# Altium PCB NucleoClone.PcbDoc (part 3 of 3)
Units mm, origin at the board's own origin, x right, y up, seen from the top; angles counter-clockwise.
Board outline 100 x 100 mm, 4 copper layers (Top Layer, Signal Layer 2, Signal Layer 1, Bottom Layer), stack 0.778 mm thick; 118 components, 177 nets, 571 pads, 394 vias.
Unrouted connection lines stored in the file: 5.
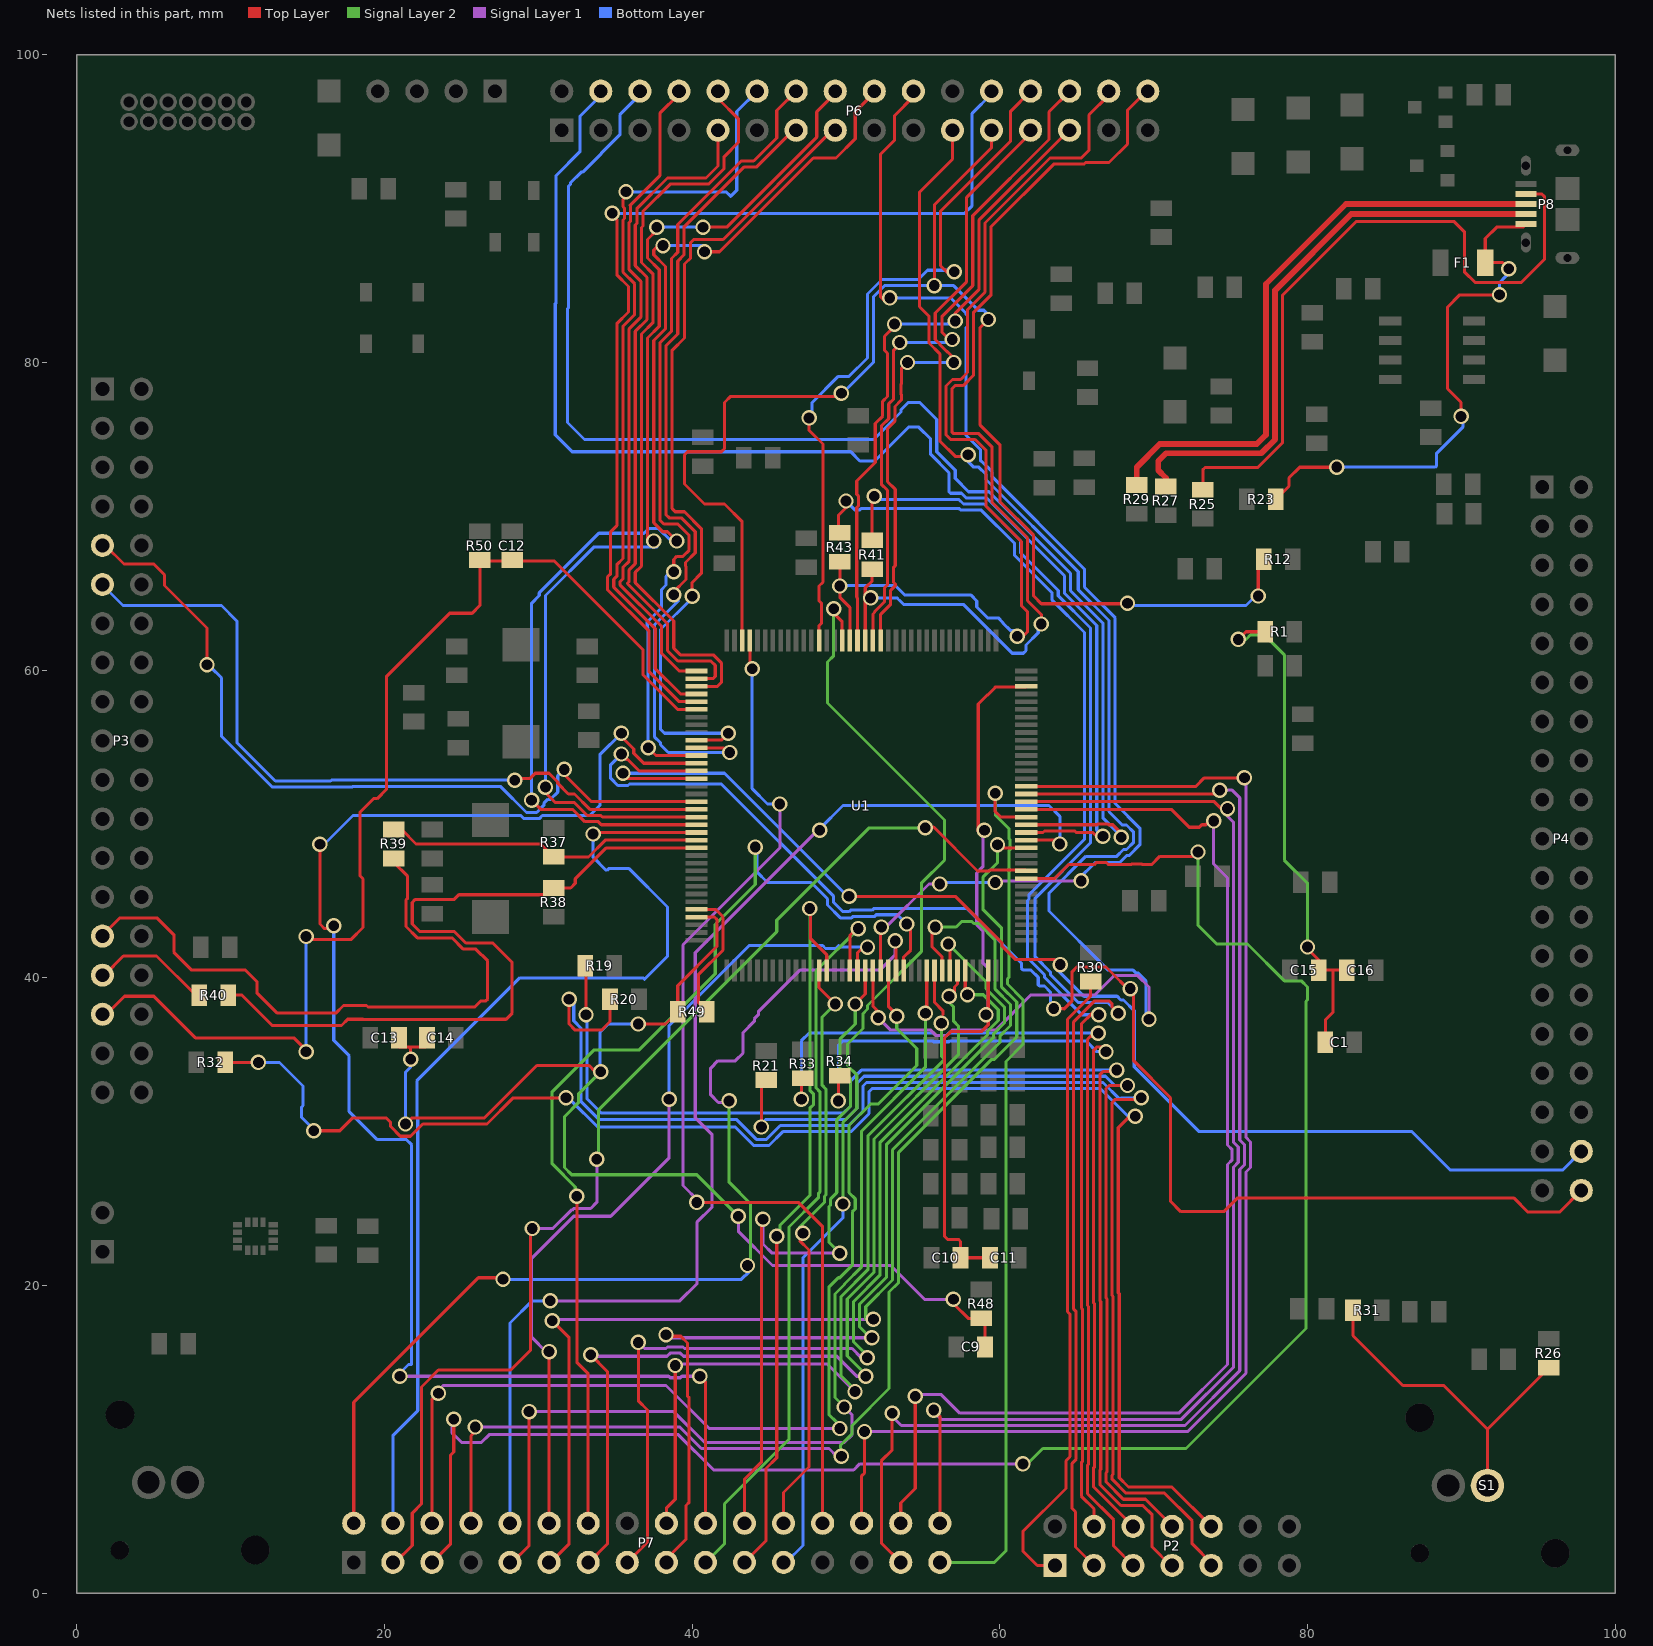
[diagram p5: the nets of this part, all layers, seen from the top]

## Via types
v1: diameter 1, hole 0.7, Top Layer to Bottom Layer, tented both sides, 390 vias
v2: diameter 1.27, hole 0.711, Top Layer to Bottom Layer, 4 vias

## Nets (pads, with @x,y where several pads share a name; then routed paths per layer and width w, separated by ;. In a path a pad name is that pad's centre, name@x,y a point inside that pad or via, vN(x,y) a via of type N, cw(c..) or ccw(c..) an arc to the next point about the centre after c; other vN are vias at no path point) (continued)
PD12: P7.5 U1.PD12 | length 119.3
  Top Layer w0.2: P7.5@23.08,2 23.1,2 24.3,3.2 24.3,8.975 24.5,9.175 24.5,11.1 v1@24.3,11.3 ; U1.PD12@61.725,46.45 63.55,46.45 64.46,47.36 66.129,47.36 66.269,47.5 66.931,47.5 67.071,47.36 68.529,47.36 68.569,47.4 69.231,47.4 69.271,47.36 69.86,47.36 70.4,47.9 72.7,47.9 v1@72.8,48
  Signal Layer 1 w0.2: v1@24.4,11.3 24.4,10.4 25,9.8 26.3,9.8 26.8,10.3 39.1,10.3 41.4,8 50.5,8 50.9,8.4 v1(61.5,8.4)
  Signal Layer 2 w0.2: v1(61.5,8.4) 61.8,8.4 62.8,9.4 72.1,9.4 79.9,17.2 79.9,38.469 80,38.569 80,39.4 79.6,39.8 78.5,39.8 76.1,42.2 74.1,42.2 72.88,43.42 v1(72.88,48.18)
  other v1: 24.5,11.3
PD13: P7.3 U1.PD13 | length 75.8
  Top Layer w0.2: P7.3@20.54,2 20.7,2 21.8,3.1 21.8,5.2 22.4,5.8 22.4,13.4 23.5,14.5 28.2,14.5 29.5,15.8 v1@29.5,23.6 ; v1@55.25,49.8 55.7,49.8 58.55,46.95 59.319,46.95 59.369,47 61.675,47 U1.PD13@61.725,46.95
  Signal Layer 1 w0.2: v1(29.6,23.7) 30.934,23.7 32.134,24.9 32.2,24.9 32.3,25 33.4,25 33.8,25.4 v1(33.8,28.2)
  Signal Layer 2 w0.2: v1@33.9,28.4 33.9,31.4 45.5,43 45.5,43.741 51.509,49.75 v1(55.15,49.75)
PD14: P7.8 U1.PD14 | length 78.5
  Top Layer w0.2: P7.8@25.62,4.54 25.62,10.22 v1@26.15,10.75 ; v1@60,48.6 60.15,48.45 U1.PD14@61.725,48.45
  Signal Layer 1 w0.2: v1@26,10.8 39.2,10.8 40.6,9.4 48.9,9.4 49.4,8.9 v1(49.7,8.9)
  Signal Layer 2 w0.2: v1@49.631,9.031 49.631,9.6 50.4,10.369 50.4,10.9 52.8,13.3 52.8,19.572 53.42,20.192 53.42,28.654 59.466,34.7 59.65,34.7 61.1,36.15 61.1,38.428 60.1,39.428 60.1,40.097 ; v1(59.85,48.65) 59.85,47.481 58.9,46.531 58.9,44.46 60.1,43.26 60.1,40.097
  other v1: 25.9,10.8
PD15: P7.10 U1.PD15 | length 80.3
  Top Layer w0.2: U1.PD15@61.725,48.95 v1@63.75,48.95
  Signal Layer 1 w0.2: v1@30.8,19 39.2,19 40.3,20.1 40.3,24.1 41.3,25.1 41.3,29.8 40.2,30.9 40.2,41.634 48.166,49.6 v1(48.3,49.6)
  Bottom Layer w0.2: P7.10@28.16,4.54 28.16,17.56 29.6,19 v1(30.78,19) ; v1@48.3,49.7 49.8,51.2 63.2,51.2 63.9,50.5 v1(63.9,48.7)
PE0: P7.26 U1.PE0 | length 68.7
  Top Layer w0.2: v1(40.3,25.4) 46.9,25.4 48.48,23.82 P7.26@48.48,4.54 ; v1@43.75,60.1 U1.PE0@43.75,61.925 U1.PE0@43.8,61.875
  Signal Layer 1 w0.2: v1@40.4,25.5 39.4,26.5 39.4,42.14 45.7,48.44 v1(45.7,51.3)
  Bottom Layer w0.2: v1(43.9,60.1) 43.9,52.3 44.9,51.3 v1@45.6,51.3
PE1: P6.23 R12.2 U1.PE1 | length 92.3
  Top Layer w0.2: U1.PE1@43.25,61.925 43.25,69.65 42.1,70.8 40.8,70.8 39.5,72.1 39.5,74 39.7,74.2 41.9,74.2 42.1,74.4 42.1,77.4 42.5,77.8 v1@49.5,77.8 ; v1(55.74,85) 55.74,90.24 59.46,93.96 P6.23@59.46,95.1 ; v1(59.25,82.8) 58.7,82.25 58.7,75.96 60,74.66 60,70.966 62.2,68.766 62.2,64.92 62.2,64.82 62.7,64.32 v1@68.4,64.32 ; v1(76.8,64.82) 76.8,66.84 R12.2@77.16,67.2
  Bottom Layer w0.2: v1(49.7,78) 49.769,78 51.8,80.031 51.8,84.291 52.509,85 v1@55.4,85 ; v1(55.74,85) 57,85 58.6,83.4 58.96,83.4 v1@59.36,83 ; v1(68.3,64.35) 68.45,64.2 76,64.2 v1@76.71,64.91
PE2: P6.8 U1.PE2 | length 42.7
  Top Layer w0.2: P6.8@39.14,97.64 39.14,97.44 37.9,96.2 37.9,92.15 35.973,90.223 36,90.197 36,89.203 35.9,89.103 35.9,86.04 36.66,85.28 36.66,82.952 35.9,82.191 35.9,69.063 35.9,67.737 35.9,67.092 35.5,66.691 35.5,65.937 35.3,65.737 35.3,65.56 38,62.86 38,61.1 39.15,59.95 U1.PE2@40.275,59.95
PE3: P6.9 U1.PE3 | length 44.9
  Top Layer w0.2: U1.PE3@40.275,59.45 41.35,59.45 41.5,59.6 41.5,60.31 41.21,60.6 39.066,60.6 38.4,61.266 38.4,63.026 35.8,65.626 35.8,65.672 35.9,65.771 35.9,66.526 36.3,66.926 36.3,67.903 36.3,68.897 36.3,82.026 37.06,82.786 37.06,85.54 36.3,86.3 36.3,88.937 36.4,89.037 36.4,90 38.4,92 40.9,92 41.68,92.78 P6.9@41.68,95.1
PE4: P6.10 U1.PE4 | length 49.2
  Top Layer w0.2: U1.PE4@40.275,58.95 41.65,58.95 41.9,59.2 41.9,60.476 41.376,61 39.231,61 38.8,61.431 38.8,63.192 36.3,65.692 36.3,66.36 36.7,66.76 36.7,68.068 36.7,68.731 36.7,81.86 37.46,82.62 37.46,85.74 36.7,86.5 36.7,88.771 36.8,88.871 36.8,89.834 38.566,91.6 41.066,91.6 42.08,92.614 42.08,93.38 43,94.3 43,95.85 41.68,97.17 P6.10@41.68,97.64
PE5: P6.12 U1.PE5 | length 50.4
  Top Layer w0.2: 35.5,69.228 35.5,67.571 35.5,67.257 35.1,66.857 35.1,66.103 34.9,65.903 34.9,65.395 37.6,62.695 37.6,60.1 39.25,58.45 U1.PE5@40.275,58.45 ; 35.5,69.228 35.5,82.357 36.26,83.117 36.26,85.114 35.5,85.874 35.5,89.269 35.6,89.368 35.6,90.031 35.5,90.131 35.5,90.6
  Bottom Layer w0.2: v1(35.7,91.1) 42.2,91.1 42.5,90.8 42.9,91.2 42.9,96.32 P6.12@44.22,97.64
PE6: P6.24 U1.PE6 | length 67.3
  Top Layer w0.2: v1@34.8,89.6 35.1,89.3 35.1,85.708 35.86,84.948 35.86,83.283 35.1,82.523 35.1,69.394 34.7,68.994 34.7,66.269 34.5,66.069 34.5,65.229 37.2,62.529 37.2,59.9 39.15,57.95 U1.PE6@40.275,57.95
  Bottom Layer w0.2: v1(34.8,89.7) 57.7,89.7 58.2,90.2 58.2,96.2 59.46,97.46 P6.24@59.46,97.64
PE7: P7.6 U1.PE7 | length 69.4
  Top Layer w0.2: P7.6@23.08,4.54 23.08,12.58 v1(23.5,13) ; U1.PE7@52.75,40.475 52.75,38.15 v1@53.34,37.56
  Signal Layer 1 w0.2: v1@23.5,13.2 23.8,13.5 38.3,13.5 41.1,10.7 v1(49.6,10.7)
  Signal Layer 2 w0.2: v1@49.4,11.1 48.883,11.617 48.883,19.883 49.5,20.5 49.6,20.5 50.416,21.316 50.416,24.784 50.6,24.969 50.6,25.631 50.2,26.031 50.2,30.4 51.6,31.8 52.1,31.8 54.6,34.3 54.6,35.4 53.3,36.7 v1(53.3,37.5)
PE8: P7.2 U1.PE8 | length 70.3
  Top Layer w0.2: P7.2@18,4.54 18,12.4 26.1,20.5 v1@27.8,20.5 ; U1.PE8@53.25,40.475 v1@53.25,42.3
  Signal Layer 1 w0.2: v1@42.2,31.9 41.7,31.9 41.2,32.4 41.2,34.131 41.669,34.6 42.8,34.6 43.3,35.1 43.3,36.434 44.04,37.174 44.04,37.331 44.3,37.591 44.3,37.8 47,40.5 52.2,40.5 53.2,41.5 v1(53.2,42.4)
  Signal Layer 2 w0.2: v1(42.4,32) 42.4,26.7 43.8,25.3 v1@43.8,21.6
  Bottom Layer w0.2: v1(27.7,20.4) 43.2,20.4 43.7,20.9 v1@43.7,21.3
  other v1: 43.6,21.3
PE9: P7.14 U1.PE9 | length 68.3
  Top Layer w0.2: v1@32.5,25.7 32.5,15 33.24,14.26 P7.14@33.24,4.54 ; U1.PE9@53.75,40.475 53.75,41.35 54.2,41.8 54.2,43.11 v1@53.9,43.41
  Signal Layer 2 w0.2: v1@32.4,25.8 32.4,26.403 30.9,27.903 30.9,32.6 33.6,35.3 36.534,35.3 41.5,40.266 41.5,43.466 44.1,46.066 v1(44.1,48.5)
  Bottom Layer w0.2: v1@44.2,48.4 44.2,46.9 44.9,46.2 47.734,46.2 48.8,45.134 48.8,44.734 49.634,43.9 50.369,43.9 50.469,44 51.869,44 51.969,44.1 53.35,44.1 v1(53.95,43.5)
  other v1: 32.5,25.8
PE10: P7.9 U1.PE10 | length 65
  Top Layer w0.2: P7.9@28.16,2 28.3,2 29.4,3.1 v1(29.4,11.8) ; v1@55.25,38.05 U1.PE10@55.25,40.475
  Signal Layer 1 w0.2: v1(29.4,11.8) 38.8,11.8 40.8,9.8 49.9,9.8 50.4,10.3 50.4,11.582 v1(49.882,12.1)
  Signal Layer 2 w0.2: v1@49.8,12.2 49.283,12.717 49.283,19.449 49.9,20.066 49.9,20.1 51.02,21.22 51.02,30.04 55.16,34.18 v1(55.16,37.7)
PE11: P7.18 U1.PE11 | length 53.1
  Top Layer w0.2: P7.18@38.32,4.54 38.32,5.52 38.9,6.1 v1(38.9,14.8) ; U1.PE11@55.75,40.475 55.75,38.41 56.3,37.86 56.3,37.63
  Signal Layer 1 w0.2: v1@38.8,14.9 48.782,14.9 v1(50.582,13.1)
  Signal Layer 2 w0.2: v1@50.5,13.3 49.683,14.117 49.683,19.283 51.42,21.02 51.42,29.72 56.41,34.71 56.2,34.921 v1(56.2,37.043)
PE12: P7.11 U1.PE12 | length 74.1
  Top Layer w0.2: P7.11@30.7,2 30.8,2 32,3.2 32,16.6 v1(30.9,17.7) ; v1@55.6,43.1 55.6,42 56.25,41.35 U1.PE12@56.25,40.475
  Signal Layer 1 w0.2: v1@30.9,17.8 v1(51.782,17.8)
  Signal Layer 2 w0.2: v1@51.383,17.817 51.283,17.817 51.283,18.62 53.02,20.357 53.02,28.82 60,35.8 60,36.197 60.7,36.897 60.7,38.263 59.7,39.263 59.7,40.263 59.7,42.45 58.62,43.53 58.311,43.53 58.181,43.66 57.519,43.66 57.159,43.3 v1(55.8,43.3)
PE13: P7.17 U1.PE13 | length 62.5
  Top Layer w0.2: v1@38.3,16.7 39.26,16.7 39.7,16.26 39.7,12.8 39.8,12.7 39.8,5.9 39.6,5.7 39.6,3.5 38.32,2.22 P7.17@38.32,2 ; v1@56.7,42.06 56.75,42.01 U1.PE13@56.75,40.475
  Signal Layer 1 w0.2: v1@38.5,16.6 v1(51.682,16.6)
  Signal Layer 2 w0.2: v1@51.5,16.7 50.883,17.317 50.883,18.786 52.62,20.523 52.62,29.154 59.6,36.134 59.6,36.363 60.3,37.063 60.3,38.097 59.1,39.297 59.1,39.74 v1(56.64,42.2)
  other v1: 38.3,16.8
PE14: P7.13 U1.PE14 | length 63.1
  Top Layer w0.2: P7.13@33.24,2 33.3,2 34.5,3.2 34.5,14.4 v1(33.4,15.5) ; v1@56.9,38.86 57.05,39.01 57.05,39.4 57.25,39.6 U1.PE14@57.25,40.475
  Signal Layer 1 w0.2: v1@33.4,15.4 38.369,15.4 38.569,15.6 39.231,15.6 39.431,15.4 49.4,15.4 50.7,14.1 v1(51.282,14.1)
  Signal Layer 2 w0.2: v1@51.2,14.3 50.083,15.417 50.083,19.117 51.82,20.854 51.82,29.52 57.3,35 57.3,36.868 57,37.169 57,38.1 56.7,38.4 v1(56.7,38.8)
PE15: P7.15 U1.PE15 | length 60.9
  Top Layer w0.2: P7.15@35.78,2 35.8,2 37.1,3.3 37.1,11.9 36.5,12.5 v1(36.5,16.3) ; U1.PE15@57.75,40.475 57.75,39.15 v1@57.9,39
  Signal Layer 1 w0.2: v1(36.5,16.3) 36.9,15.9 38.303,15.9 38.403,16 39.397,16 39.497,15.9 50.4,15.9 51,15.3 v1(51.382,15.3)
  Signal Layer 2 w0.2: v1@51.2,15.62 50.483,16.337 50.483,18.951 52.22,20.689 52.22,29.32 59.2,36.3 59.2,36.529 59.9,37.229 59.9,37.931 58.931,38.9 v1(57.9,38.9)
PF0: P6.15 U1.PF0 | length 53.2
  Top Layer w0.2: v1(40,64.8) 40,65.7 40.6,66.3 40.6,68.9 40.6,69.2 39.5,70.3 38.9,70.3 38.7,70.5 38.7,80.8 39.5,81.6 39.5,86.4 39.9,86.8 39.9,87.8 40.1,88 40.369,88 42.016,88 49.116,95.1 P6.15@49.3,95.1 ; U1.PF0@40.275,55.45 41.9,55.45 v1@42.25,55.8
  Bottom Layer w0.2: v1@39.9,64.6 37.94,62.64 37.94,56.16 38.2,55.9 v1(42.34,55.9)
PF1: P6.13 U1.PF1 | length 53.4
  Top Layer w0.2: v1(38.8,64.9) 38.8,65.1 39.6,65.9 39.6,66.731 39.566,66.765 39.566,67 40.2,67.634 40.2,69 39.3,69.9 38.5,69.9 38.3,70.1 38.3,81.1 39.06,81.86 39.06,86.595 39.46,86.995 39.46,88.805 43.356,92.7 44.166,92.7 46.76,95.294 P6.13@46.76,95.1 ; U1.PF1@40.275,54.95 42.05,54.95 v1@42.3,54.7
  Bottom Layer w0.2: 39.1,64.5 37.54,62.94 37.54,55.681 37.94,55.281 37.94,55.16 38.45,54.65 v1(42.44,54.65)
PF2: P6.14 U1.PF2 | length 52.8
  Top Layer w0.2: v1@37.3,54.8 37.65,54.45 U1.PF2@40.275,54.45 ; v1(38.8,66.4) 38.8,67.2 39,67.4 39.4,67.4 39.8,67.8 39.8,68.76 39.06,69.5 38.16,69.5 37.9,69.76 37.9,81.266 38.66,82.026 38.66,86.76 39.06,87.16 39.06,88.97 43.19,93.1 44,93.1 45.5,94.6 45.5,96.38 P6.14@46.76,97.64
  Bottom Layer w0.2: v1(37.14,54.95) 37.14,62.687 37.078,62.749 37.078,63.131 37.14,63.193 38,64.053 38,65.232 38.3,65.532 38.3,66.097 38.602,66.4 v1(38.8,66.4)
PF3: P7.20 U1.PF3 | length 98.3
  Top Layer w0.2: v1(15.8,48.69) 15.8,43.5 16.1,43.2 v1@16.3,43.2 ; v1@35.5,55.8 35.5,55.581 36.2,54.881 36.2,54.6 36.85,53.95 U1.PF3@40.275,53.95 ; v1(40.5,14.1) 40.86,13.74 P7.20@40.86,4.54
  Signal Layer 1 w0.2: v1(21,14.1) 38.469,14.1 38.569,14 39.231,14 39.331,14.1 v1@40.3,14.1
  Bottom Layer w0.2: v1@15.9,48.5 17.95,50.55 28.863,50.55 29.063,50.35 30.057,50.35 30.257,50.55 33.35,50.55 34,51.2 34,54.5 v1(35.4,55.9) ; v1(16.7,43.39) 16.7,35.931 17.7,34.931 17.7,31.3 19.5,29.5 21.4,29.5 21.76,29.14 21.76,14.86 21.56,14.86 v1@20.9,14.2
PF4: P4.38 U1.PF4 | length 94.2
  Top Layer w0.2: v1@35.6,54.3 35.7,54.2 35.8,54.2 36.55,53.45 U1.PF4@40.275,53.45 ; v1(63.5,38) 64.12,38 64.16,37.96 64.7,38.5 64.7,40.4 65,40.7 66.9,40.7 68.7,38.9 68.7,34.6 71.1,32.2 71.1,25.468 71.768,24.8 74.566,24.8 75.466,25.7 93.4,25.7 94.32,24.78 96.4,24.78 P4.38@97.8,26.18
  Bottom Layer w0.2: v1(35.4,54.55) 34.7,53.85 34.7,52.969 35.169,52.5 35.831,52.5 35.931,52.6 41.9,52.6 49.2,45.3 49.2,44.9 49.8,44.3 50.203,44.3 50.303,44.4 51.703,44.4 51.803,44.5 57.869,44.5 61.4,40.969 61.4,40.631 61.531,40.5 62.031,40.5 62.5,40.031 62.5,39.531 62.569,39.463 62.906,39.463 63.3,39.069 v1@63.3,38
  other v1: 68.48,39.3
PF5: P4.36 U1.PF5 | length 81.1
  Top Layer w0.2: v1@35.45,52.95 U1.PF5@40.275,52.95 ; v1(50.2,45.3) 57.107,45.3 60.15,42.257 60.15,42.05 61,41.2 63.594,41.2 v1(63.934,40.86)
  Bottom Layer w0.2: v1(35.5,53.3) 42.1,53.3 v1@50.175,45.225 ; v1(63.934,40.86) 63.667,40.593 65.46,38.8 67.629,38.8 67.869,38.56 68.04,38.56 68.74,37.86 68.74,34.22 72.96,30 86.8,30 89.3,27.5 96.58,27.5 P4.36@97.8,28.72
PF6: P3.9 U1.PF6 | length 52.3
  Top Layer w0.2: P3.9@1.66,68.11 1.85,68.11 3.06,66.9 5,66.9 5.7,66.2 5.7,65.5 8.46,62.74 v1(8.46,60.35) ; v1@31.7,53.4 31.7,53.2 33.45,51.45 U1.PF6@40.275,51.45
  Bottom Layer w0.2: v1@8.7,60.2 9.4,59.5 9.4,55.7 12.7,52.4 17.9,52.4 17.95,52.45 27.529,52.45 29.229,50.75 29.892,50.75 30.36,51.219 30.36,51.34 30.62,51.6 30.792,51.6 31.26,52.069 31.26,53.13 v1(31.68,53.55)
PF7: P3.11 U1.PF7 | length 49.5
  Top Layer w0.2: v1@28.7,52.95 29.45,52.95 29.8,53.3 30.692,53.3 31.26,52.731 31.26,52.64 31.95,51.95 32.35,51.95 33.35,50.95 U1.PF7@40.275,50.95
  Bottom Layer w0.2: P3.11@1.66,65.57 1.66,65.54 3,64.2 9.4,64.2 10.4,63.2 10.4,55.3 12.9,52.8 16.5,52.8 16.55,52.85 v1(28.46,52.85)
PF8: P6.16 U1.PF8 | length 70.2
  Top Layer w0.2: v1@30.5,52.4 30.5,52 31.1,51.4 32.334,51.4 33.184,50.55 34.057,50.55 34.157,50.45 U1.PF8@40.275,50.45 ; v1(37.5,68.4) 37.5,68.1 37.1,68.5 37.1,81.597 37.86,82.357 37.86,86.04 37.1,86.8 37.1,88 v1@37.7,88.6 ; v1(40.7,88.8) 42.25,88.8 48.1,94.65 48.1,96.3 49.3,97.5 P6.16@49.3,97.64
  Bottom Layer w0.2: v1(30.46,52.4) 30.46,64.86 33.6,68 37.7,68 37.5,68.2 v1(37.5,68.4) ; v1(37.7,88.8) v1@40.4,88.8
PF9: P6.18 U1.PF9 | length 76.7
  Top Layer w0.2: v1@29.6,51.5 30.15,50.95 32.219,50.95 33.019,50.15 33.892,50.15 34.092,49.95 U1.PF9@40.275,49.95 ; v1@38,87.8 37.5,87.3 37.5,87.006 38.26,86.245 38.26,82.192 37.5,81.431 37.5,69.595 38.095,69 38.4,69 v1(39,68.4) ; v1(40.8,87.2) 41.781,87.2 47.881,93.3 49.35,93.3 50.6,94.55 50.6,96.3 51.84,97.54 P6.18@51.84,97.64
  Bottom Layer w0.2: v1(29.56,51.55) 29.56,64.36 30.06,64.86 30.06,65.026 33.934,68.9 36.869,68.9 37.169,69.2 37.831,69.2 38.631,68.4 v1@39.14,68.4 ; v1(38.1,87.6) 40.8,87.6 v1(40.8,87.2)
PF10: P7.4 U1.PF10 | length 66.8
  Top Layer w0.2: v1@33.65,49.45 U1.PF10@40.275,49.45
  Bottom Layer w0.2: P7.4@20.54,4.54 20.54,10.24 22.16,11.86 22.16,30.831 22.1,30.892 22.1,33.3 28.8,40 32.697,40 36.8,40 36.9,39.9 38.4,41.4 38.4,44.6 35.9,47.1 34.569,47.1 34.469,47 34.4,47 33.56,47.84 v1(33.56,49.35)
PF11: P7.24 U1.PF11 | length 38
  Top Layer w0.2: P7.24@45.94,4.54 45.94,6.54 47.6,8.2 47.6,22.3 47,22.9 ; U1.PF11@48.25,40.475 48.25,39.35 v1(49.3,38.3)
  Signal Layer 2 w0.2: v1(47.2,23.4) 47.2,23.6 47,23.8 48.6,25.4 48.6,25.797 48.7,25.897 48.7,32.763 48.45,33.013 48.45,37.45 v1(49.3,38.3)
PF12: P7.21 U1.PF12 | length 48.9
  Top Layer w0.2: P7.21@43.4,2 44.8,3.4 44.8,8.1 45.5,8.8 v1(45.5,23.2) ; v1@47.7,44.4 47.7,42.54 48.75,41.49 U1.PF12@48.75,40.475
  Signal Layer 2 w0.2: v1@45.7,23.1 45.7,23.9 47.65,25.85 47.65,31.519 47.9,31.769 47.9,32.431 47.65,32.681 v1(47.65,44.51)
PF13: P7.19 U1.PF13 | length 48.5
  Top Layer w0.2: U1.PF13@50.25,40.475 50.25,42.75 v1@50.7,43.2
  Signal Layer 2 w0.2: P7.19@40.86,2 40.9,2 42.1,3.2 42.1,5.8 46.3,10 46.3,23.8 48.2,25.7 48.2,25.963 48.3,26.063 48.3,32.597 48.05,32.847 48.05,40.45 v1(50.8,43.2)
PF14: P7.12 U1.PF14 | length 54.5
  Top Layer w0.2: P7.12@30.7,4.54 v1@30.7,15.5 ; U1.PF14@50.75,40.475 50.75,41.63 v1@51.22,42.1
  Signal Layer 1 w0.2: v1@30.5,15.7 29.56,16.64 29.56,21.76 32.3,24.5 34.7,24.5 38.5,28.3 v1(38.5,32.1)
  Bottom Layer w0.2: v1@38.5,32.3 38.5,36.9 43.7,42.1 48.479,42.1 48.669,41.91 49.331,41.91 49.521,42.1 49.621,42 v1(51.4,42)
  other v1: 30.7,15.7
PF15: P7.22 U1.PF15 | length 47.2
  Top Layer w0.2: P7.22@43.4,4.54 43.4,7.4 44.5,8.5 44.5,23.8 v1@44.9,24.2 ; v1@50.7,38.4 51.25,38.95 U1.PF15@51.25,40.475
  Signal Layer 1 w0.2: v1(44.6,24.3) 44.6,22.7 45.2,22.1 v1(49.6,22.1)
  Signal Layer 2 w0.2: v1(49.6,22.1) 48.9,22.8 48.9,25.134 49,25.234 49,25.631 49.4,26.031 49.4,30 49.4,30.769 50.3,31.669 50.3,33.4 49.6,34.1 49.6,36 50.6,37 v1(50.6,38.3)
PG0: P6.21 U1.PG0 | length 97.6
  Top Layer w0.2: U1.PG0@51.75,40.475 51.75,38.15 52.1,37.8 v1(52.1,37.4) ; P6.21@56.92,95.1 56.92,93.22 54.78,91.08 54.78,83.636 55.4,83.016 55.4,81.266 56.1,80.566 56.1,74.9 57.1,73.9 v1@57.7,73.9
  Signal Layer 1 w0.2: v1(52.1,37.4) 52.9,36.6 55.511,36.6 55.869,36.243 56.531,36.243 56.889,36.6 59.731,36.6 62.011,38.88 66.18,38.88 67.46,40.16 68.94,40.16 69.7,39.4 v1(69.7,37.3)
  Bottom Layer w0.2: v1(57.94,74) 57.94,73.56 58.3,73.2 58.631,73.2 59.1,72.731 59.1,72.4 65.1,66.4 65.1,65.234 67.1,63.234 67.1,50.8 67.96,49.94 68.231,49.94 68.7,49.471 68.7,48.809 68.231,48.34 68.04,48.34 67.6,47.9 65.594,47.9 63.2,45.506 63.2,44.34 67.04,40.5 68.669,40.5 68.869,40.3 69,40.3 69.5,39.8 v1@69.5,37.4
PG1: P6.20 U1.PG1 | length 81.1
  Top Layer w0.2: U1.PG1@52.25,40.475 52.25,43.25 v1(52.3,43.3) ; v1@52.6,84 52.5,84 52.24,84.26 52.24,93.54 53.15,94.45 53.15,96.05 54.38,97.28 P6.20@54.38,97.64
  Signal Layer 1 w0.2: v1(52.3,43.3) 52.41,43.41 52.71,43.41 55.4,46.1 v1(56.1,46.1) ; v1@59.9,46.3 v1(65.3,46.3)
  Bottom Layer w0.2: v1(52.84,84.2) 56.8,84.2 57.8,83.2 57.8,83.131 57.9,83.031 57.9,82.369 57.8,82.269 57.8,75.271 58.74,74.331 58.74,73.6 58.797,73.6 59.5,72.897 59.5,72.566 65.5,66.566 65.5,65.4 67.5,63.4 67.5,51.33 69.1,49.73 69.1,48.643 68.397,47.94 68.24,47.94 67.8,47.5 66.2,47.5 v1@65.1,46.4 ; v1@56.2,46.2 v1(59.7,46.2)
PG2: P6.4 U1.PG2 | length 86.7
  Top Layer w0.2: U1.PG2@61.725,49.45 62.806,49.45 62.901,49.545 64.874,49.545 64.969,49.45 66.05,49.45 66.3,49.2 v1(66.7,49.2)
  Bottom Layer w0.2: P6.4@34.06,97.64 34.06,97.36 32.7,96 32.7,93.7 31.16,92.16 31.16,83.889 31.1,83.828 31.1,75.3 32.2,74.2 50.3,74.2 50.9,73.6 51.86,73.6 54.06,75.8 54.731,75.8 55.5,75.031 55.5,74.031 56.7,72.831 56.7,71.6 56.8,71.5 57.503,71.5 57.803,71.2 59.131,71.2 64.2,66.131 64.2,65.003 66.3,62.903 66.3,49.6 v1(66.7,49.2)
PG3: P6.6 U1.PG3 | length 88.9
  Top Layer w0.2: U1.PG3@61.725,49.95 66.319,49.95 66.369,50 67.031,50 67.081,49.95 67.35,49.95 67.9,49.4 v1(67.9,49.14)
  Bottom Layer w0.2: P6.6@36.6,97.64 36.6,97.4 35.3,96.1 35.3,94.8 32.876,92.376 32.779,92.376 32.076,91.673 32.076,91.576 31.96,91.46 31.96,83.557 31.9,83.497 31.9,76.1 33,75 51.8,75 53.58,76.78 53.58,76.931 54.049,77.4 54.8,77.4 55.9,76.3 55.9,74.197 57.1,72.997 57.1,72.469 57.969,71.6 59.297,71.6 64.6,66.297 64.6,65.169 66.7,63.069 66.7,50.4 v1@67.8,49.3
PG4: P7.31 U1.PG4 | length 58.3
  Top Layer w0.2: v1@59.7,51.7 59.7,50.8 60.05,50.45 U1.PG4@61.725,50.45
  Signal Layer 2 w0.2: P7.31@56.1,2 59.65,2 60.4,2.75 60.4,34.563 61.5,35.663 61.5,38.594 60.5,39.594 60.5,39.931 60.6,40.031 60.6,48.269 60.65,48.319 60.65,48.981 60.6,49.031 60.6,49.7 59.71,50.59 v1(59.71,52)
PG5: P7.30 U1.PG5 | length 79.3
  Top Layer w0.2: P7.30@53.56,4.54 53.56,5.86 54.5,6.8 v1(54.5,12.8) ; U1.PG5@61.725,50.95 71.149,50.95 72.309,49.79 72.971,49.79 73.131,49.95 73.391,49.95 73.641,50.2 v1(73.9,50.2)
  Signal Layer 1 w0.2: v1@54.7,12.9 56.2,12.9 57.4,11.7 71.634,11.7 74.8,14.866 74.8,27.869 75.1,28.169 75.1,28.831 74.8,29.131 74.8,46.5 73.9,47.4 v1(73.9,50.2)
PG6: P7.32 U1.PG6 | length 78.2
  Top Layer w0.2: v1@55.9,11.7 56.1,11.5 P7.32@56.1,4.54 ; U1.PG6@61.725,51.45 73.95,51.45 74.4,51 v1(74.8,51)
  Signal Layer 1 w0.2: v1@55.8,11.7 56.2,11.3 71.8,11.3 75.2,14.7 75.2,27.703 75.5,28.003 75.5,28.997 75.2,29.297 75.2,50.1 74.8,50.5 v1(74.8,51)
  other v1: 55.7,11.9
PG7: P7.29 U1.PG7 | length 86.6
  Top Layer w0.2: v1(53,11.7) 53,9.3 52.3,8.6 52.3,3.26 P7.29@53.56,2 ; U1.PG7@61.725,51.95 74.05,51.95 v1(74.3,52.2)
  Signal Layer 1 w0.2: v1@52.9,11.6 53.6,10.9 72.034,10.9 75.6,14.466 75.6,27.537 75.9,27.837 75.9,29.163 75.6,29.463 75.6,51.7 75.1,52.2 v1(74.3,52.2)
PG8: P7.28 U1.PG8 | length 85.8
  Top Layer w0.2: P7.28@51.02,4.54 51.02,7.62 51.2,7.8 v1(51.2,10.5) ; U1.PG8@61.725,52.45 72.75,52.45 73.3,53 v1(75.9,53)
  Signal Layer 1 w0.2: v1(51.2,10.5) 72.2,10.5 76,14.3 76,27.372 76.3,27.672 76.3,29.328 76,29.628 76,52.9 v1(75.9,53)
PG9: P6.25 U1.PG9 | length 40
  Top Layer w0.2: U1.PG9@52.25,61.925 52.25,63.63 52.9,64.28 52.9,65.186 53.2,65.486 53.2,65.603 53.1,65.703 53.1,66.697 53.2,66.797 53.2,71.753 52.7,72.253 52.7,75.706 53.18,76.186 53.18,77.146 53.6,77.566 53.6,77.919 53.58,77.939 53.58,78.601 53.6,78.621 53.6,79.6 v1(54,80) ; v1(57,80) 57,80.3 56.6,80.7 56.569,80.7 56.1,81.168 56.1,81.2 55.8,81.5 55.8,83.22 57.84,85.26 57.84,90.74 62,94.9 P6.25@62,95.1
  Bottom Layer w0.2: v1(54,80) 56.5,80
PG10: P6.28 U1.PG10 | length 43.3
  Top Layer w0.2: U1.PG10@51.75,61.925 51.75,63.65 51.85,63.75 51.85,63.796 52.5,64.446 52.5,65.351 52.7,65.551 52.7,71.687 52.3,72.087 52.3,75.871 52.78,76.351 52.78,77.311 53.1,77.631 53.1,80.8 v1@53.3,81 ; v1(56.9,81.5) 56.7,81.5 56.25,81.95 56.25,83.01 58.24,85 58.24,89.54 63.2,94.5 63.2,96.3 P6.28@64.54,97.64
  Bottom Layer w0.2: v1(53.5,81.3) 56.5,81.3 v1@56.7,81.5
PG11: P6.32 R41.1 U1.PG11 | length 64.7
  Top Layer w0.2: U1.PG11@51.25,61.925 v1@51.25,64.7 ; v1(51.6,64.7) v1@51.25,64.7 ; R41.1@51.7,66.56 51.7,65.8 51.25,65.35 v1@51.25,64.7 ; v1(62.7,63) 62.7,63.62 61.8,64.52 61.8,68.6 59.5,70.9 59.5,74.5 58.6,75.4 56.966,75.4 56.9,75.466 56.9,78.309 57.091,78.5 57.616,78.5 58.3,79.184 58.3,83.269 59.44,84.409 59.44,88.84 63.5,92.9 65.466,92.9 65.566,93 67.1,93 68.3,94.2 68.3,96.4 69.54,97.64 P6.32@69.62,97.64
  Bottom Layer w0.2: v1(51.6,64.7) 53.3,64.7 53.443,64.557 53.457,64.557 53.734,64.28 57.62,64.28 60.8,61.1 61.531,61.1 61.7,61.269 61.7,61.631 62.5,62.431 62.5,62.8 v1(62.7,63)
PG12: P6.27 U1.PG12 | length 41.1
  Top Layer w0.2: U1.PG12@50.75,61.925 50.75,64.7 50.7,64.75 50.7,70.569 50.8,70.669 50.8,71.331 50.7,71.431 50.7,72.3 51.9,73.5 51.9,76.037 52.38,76.517 52.38,77.477 52.7,77.797 52.7,80.6 52.5,80.8 52.5,81.7 v1@53.1,82.3 ; v1(57.1,82.7) 57.1,83.2 58.64,84.74 58.64,89.24 64.5,95.1 P6.27@64.54,95.1
  Bottom Layer w0.2: v1(53.15,82.5) 56.8,82.5 v1@57,82.7
PG13: P6.30 R43.1 U1.PG13 | length 63.6
  Top Layer w0.2: R43.1@49.6,67.06 49.6,64.731 50.25,64.081 U1.PG13@50.25,61.925 ; v1(61.137,62.2) 61.5,62.2 61.8,62.5 61.8,63.8 61.4,64.2 61.4,68.366 59.1,70.666 59.1,74.3 58.4,75 56.8,75 56.5,75.3 56.5,78.475 56.925,78.9 57.45,78.9 57.9,79.35 57.9,83.434 59.04,84.574 59.04,89.074 63.266,93.3 65.3,93.3 65.8,93.8 65.8,96.1 67.08,97.38 P6.30@67.08,97.64
  Bottom Layer w0.2: v1(49.6,65.47) 49.63,65.5 53.2,65.5 53.8,64.9 58.1,64.9 58.5,64.5 58.5,64.103 59.203,63.4 59.9,63.4 60.2,63.1 60.2,63.069 60.7,62.569 60.931,62.569 61.137,62.363 v1(61.137,62.2)
PG14: P7.23 U1.PG14 | length 72.4
  Top Layer w0.2: v1(49.2,64) 49.2,63.7 49.75,63.15 U1.PG14@49.75,61.925
  Signal Layer 2 w0.2: v1(49.2,64) 49.2,60.931 48.8,60.531 48.8,57.866 56.4,50.266 56.4,47.65 54.9,46.15 54.9,41.7 51.4,38.2 51.4,37.969 51.1,37.669 51.1,36.7 50.1,35.7 50.1,34.3 50.7,33.7 50.7,31.503 49.8,30.603 v1(49.8,25.3)
  Bottom Layer w0.2: P7.23@45.94,2 46.1,2 47.2,3.1 47.2,21.8 49.8,24.4 v1@49.8,25.2
PG15: P6.26 U1.PG15 | length 45.9
  Top Layer w0.2: v1@47.6,76.1 47.6,75.6 48.5,74.7 48.5,65.72 48.25,65.47 48.25,64.513 48.4,64.363 48.4,63.037 48.25,62.887 U1.PG15@48.25,61.925 ; v1(57.04,85.9) 56.54,85.9 56.14,86.3 56.14,89.84 60.7,94.4 60.7,96.34 P6.26@62,97.64
  Bottom Layer w0.2: v1(47.6,76.4) 47.8,76.6 47.8,77.4 49.5,79.1 50.2,79.1 51.4,80.3 51.4,84.457 52.343,85.4 54.7,85.4 55.3,86 v1@57,86
PH0: P3.29 R39.1 | length 43.2
  Top Layer w0.2: P3.29@1.66,42.71 1.66,42.76 2.8,43.9 5.2,43.9 6.3,42.8 6.3,41.666 7.466,40.5 10.966,40.5 11.7,39.766 11.7,39.031 13.031,37.7 16.834,37.7 17.334,38.2 18.831,38.2 18.931,38.1 25.869,38.1 26.269,38.5 26.588,38.5 26.7,38.612 26.7,40.068 26.7,40.731 26.7,41.1 25.938,41.862 25.122,41.862 24.384,42.6 22.134,42.6 21.4,43.334 21.4,45.066 21.5,45.166 21.5,46.6 20.6,47.5 R39.1@20.6,47.76
PH0-OSC_IN: R37.2 R39.2 U1.PH0 | length 20.9
  Top Layer w0.2: R39.2@20.6,49.64 21.11,49.64 22.05,48.7 30.16,48.7 R37.2@31,47.86 33.26,47.86 34.35,48.95 U1.PH0@40.275,48.95
PH1: P3.31 R40.1 | length 7.9
  Top Layer w0.2: P3.31@1.66,40.17 1.77,40.17 3.02,41.42 5.18,41.42 7.72,38.88 R40.1@7.96,38.88
PH1-OSC_OUT: R38.2 R40.2 U1.PH1 | length 52
  Top Layer w0.2: R40.2@9.84,38.88 10.72,38.88 12.7,36.9 17.2,36.9 17.609,37.309 18.591,37.309 18.6,37.3 26.2,37.3 26.209,37.309 27.909,37.309 28.3,37.7 28.3,41 27.038,42.262 25.288,42.262 24.55,43 22.3,43 21.8,43.5 21.8,44.9 22,45.1 24.53,45.1 24.83,45.4 30.56,45.4 R38.2@31,45.84 32.1,45.84 32.4,46.14 32.4,46.431 34.419,48.45 U1.PH1@40.275,48.45
RMII_CRS_DV: P2.8 R21.2 | length 62.5
  Top Layer w0.2: v1(44.5,30.3) 44.5,33.46 R21.2@44.8,33.76 ; v1(68.3,33) 67.1,33 66.9,32.8 66.9,19.19 66.962,19.128 66.962,7.88 66.9,7.818 66.9,7.231 68.031,6.1 69.466,6.1 71.2,4.366 P2.8@71.2,4.34
  Bottom Layer w0.2: v1@44.6,30.4 44.6,30.6 44.8,30.8 49.997,30.8 50.7,31.503 50.7,33.134 51.166,33.6 66.869,33.6 67.469,33 v1(68.3,33)
RMII_MDC: P2.10 R32.2 | length 99.4
  Top Layer w0.2: R32.2@9.64,34.5 v1(11.8,34.5) ; v1@15.62,30.1 15.66,30.06 17.097,30.06 17.937,30.9 20.1,30.9 20.4,30.6 20.4,30.329 21.029,29.7 21.692,29.7 22.492,30.5 26.666,30.5 28.366,32.2 v1(31.8,32.2) ; v1@68.74,31.3 67.7,30.26 67.7,19.522 67.762,19.46 67.762,7.549 67.738,7.525 68.363,6.9 71.18,6.9 P2.10@73.74,4.34
  Bottom Layer w0.2: v1@11.9,34.5 13.169,34.5 14.7,32.969 14.7,31.691 14.6,31.591 14.6,30.929 v1@15.229,30.3 ; v1@32.115,32.044 33.859,30.3 42.8,30.3 44,29.1 44.997,29.1 45.897,30 50.328,30 51.5,31.172 51.5,32.6 51.7,32.8 66.537,32.8 68.337,31 v1(68.8,31)
  other v1: 15.4,30.06
RMII_MDIO: P2.9 R20.2 | length 89.1
  Top Layer w0.2: v1(32,38.6) 32,37 32.4,36.6 34.1,36.6 34.66,37.16 R20.2@34.66,38.6 ; v1@68.9,32.1 67.5,32.1 67.3,31.9 67.3,19.356 67.362,19.294 67.362,7.715 67.3,7.653 67.3,7.397 68.197,6.5 70.7,6.5 72.5,4.7 72.5,3.2 73.74,1.96 P2.9@73.74,1.8
  Bottom Layer w0.2: v1@32.3,38.4 32.3,37.2 32.76,36.74 32.76,31.974 33.934,30.8 42.869,30.8 44.169,29.5 44.831,29.5 45.731,30.4 50.163,30.4 51.1,31.337 51.1,32.969 51.331,33.2 66.703,33.2 67.803,32.1 67.903,32.2 v1(69.197,32.2)
RMII_REF_CLK: P2.7 R19.2 | length 81.5
  Top Layer w0.2: R19.2@33.06,40.8 33.1,40.76 v1(33.1,37.6) ; v1@67.6,33.9 66.7,33.9 66.5,33.7 66.5,19.025 66.562,18.963 66.562,8.046 66.5,7.984 66.5,7.066 67.866,5.7 69.3,5.7 69.9,5.1 69.9,3 71.1,1.8 P2.7@71.2,1.8
  Bottom Layer w0.2: v1@33.16,37.5 33.16,32.14 34.1,31.2 49.831,31.2 50.3,31.669 50.3,33.3 51,34 v1(67.6,34)
RMII_RXD0: P2.5 R33.2 | length 61.2
  Top Layer w0.2: v1(47.1,32.1) 47.1,33.66 R33.2@47.2,33.76 ; v1@66.2,36.2 65.9,36.2 65.7,36 65.7,18.693 65.762,18.631 65.762,8.377 65.7,8.315 65.7,6.466 67.4,4.766 67.4,3.06 P2.5@68.66,1.8
  Bottom Layer w0.2: v1(47.1,32.1) 47.1,35.9 47.6,36.4 55.711,36.4 55.869,36.243 56.531,36.243 56.689,36.4 v1(66.4,36.4)
RMII_RXD1: P2.6 R34.2 | length 55.7
  Top Layer w0.2: v1(49.5,32) 49.5,33.66 R34.2@49.6,33.76 ; v1@66.6,35.5 66.3,35.5 66.1,35.3 66.1,18.859 66.162,18.797 66.162,8.212 66.1,8.15 66.1,6.9 P2.6@68.66,4.34
  Bottom Layer w0.2: v1@49.5,32.2 49.5,35.6 49.8,35.9 55.645,35.9 55.703,35.843 56.697,35.843 56.754,35.9 65.6,35.9 66.3,35.2 v1(66.9,35.2)
RMII_TX_EN: P2.3 R41.2 | length 90.7
  Top Layer w0.2: R41.2@51.7,68.44 51.7,71.16 v1(51.84,71.3) ; P2.3@66.12,1.8 64.92,3 64.92,5.28 64.7,5.5 64.7,8.434 64.9,8.634 64.9,8.647 64.962,8.709 64.962,18.3 64.8,18.462 64.8,37.134 66.166,38.5 67.1,38.5 67.3,38.3 67.3,38.1 v1(67.7,37.7)
  Bottom Layer w0.2: v1@52.1,71.1 57.337,71.1 57.637,70.8 58.966,70.8 61.35,68.416 61.35,67.634 63.8,65.184 63.8,64.837 65.9,62.737 65.9,48.771 62.3,45.171 62.3,41.363 63.3,40.363 63.3,40.2 65.1,38.4 67,38.4 v1(67.7,37.7)
RMII_TXD0: P2.4 R43.2 | length 85.8
  Top Layer w0.2: R43.2@49.5,68.54 49.5,70.06 50.14,70.7 50,70.84 v1(50,71) ; P2.4@66.12,4.34 66.12,5.48 65.3,6.3 65.3,8.481 65.362,8.543 65.362,18.466 65.3,18.528 65.3,37 66,37.7 v1@66.2,37.7
  Bottom Layer w0.2: v1(50,71) 50.6,70.4 50.866,70.4 50.966,70.5 57.372,70.5 57.472,70.4 58.8,70.4 60.95,68.25 60.95,67.469 63.4,65.019 63.4,64.55 65.5,62.45 65.5,49 61.9,45.4 61.9,45.122 61.8,45.022 61.8,41.297 62.9,40.197 62.9,40.034 65.334,37.6 v1(66.431,37.6)
RMII_TXD1: P2.1 R30.1 | length 41.7
  Top Layer w0.2: P2.1@63.58,2.08 P2.1@63.58,1.8 62.44,1.8 61.5,2.74 61.5,4 64.3,6.8 64.3,8.6 64.5,8.8 64.5,8.812 64.562,8.874 64.562,18.134 64.4,18.296 64.4,37.3 65.9,38.8 R30.1@65.9,39.76
USB_FS_ID: P8.4 R25.2 | length 44.9
  Top Layer w0.2: R25.2@73.2,71.74 73.2,73.04 73.335,73.175 76.768,73.175 78.39,74.797 78.39,84.39 83.159,89.159 89.54,89.159 90.2,88.5 90.2,85.9 90.9,85.2 93.9,85.2 95.4,86.7 95.4,90.8 95.25,90.95 P8.4@94.2,90.95
USB_FS_N: P8.2 R27.2 | length 38.1
  Top Layer w0.381: R27.2@70.8,71.94 70.8,72.5 70.3,73 70.3,73.6 70.8,74.1 77,74.1 77.9,75 77.9,84.7 82.85,89.65 P8.2@94.2,89.65
USB_FS_P: P8.3 R29.2 | length 39.3
  Top Layer w0.381: R29.2@68.9,72.04 68.9,73.2 70.4,74.7 76.702,74.7 77.3,75.298 77.3,85.1 82.5,90.3 P8.3@94.2,90.3
USB_FS_VBUS: F1.1 P8.1 R23.2 | length 34.2
  Top Layer w0.2: R23.2@77.94,71.1 78.8,71.96 78.8,72.5 79.49,73.19 v1@81.71,73.19 ; v1(89.985,76.5) 89.985,77.415 89.1,78.3 89.1,83.6 89.9,84.4 v1@92.3,84.4 ; v1(93.085,86.1) 92.685,86.5 F1.1@91.56,86.5 91.56,88.06 92.3,88.8 94,88.8 P8.1@94.2,89
  Bottom Layer w0.2: v1(81.9,73.2) 88.3,73.2 88.4,73.3 88.4,74.1 90.1,75.8 v1@90.1,76.4 ; v1(92.485,84.4) 92.485,85.185 92.9,85.6 v1@92.9,85.9
VBAT: C12.2 P3.33 R50.1 U1.VBAT | length 74.1
  Top Layer w0.2: P3.33@1.66,37.63 1.93,37.63 3.1,38.8 5,38.8 7.7,36.1 14.1,36.1 v1@14.754,35.446 ; v1(14.9,42.69) 15.09,42.5 17.834,42.5 18.6,43.266 18.6,46.432 18.402,46.631 18.402,50.769 19.28,51.648 19.516,51.648 20.14,52.271 20.14,59.606 24.234,63.7 25.7,63.7 26.2,64.2 R50.1@26.2,67.16 26.26,67.1 31.031,67.1 36.8,61.331 36.8,59.7 39.05,57.45 U1.VBAT@40.275,57.45
  Bottom Layer w0.2: v1(14.9,35.2) v1(14.9,42.69) v1@14.9,43
VCAP: C10.2 C11.2 U1.VCAP | length 48.4
  Top Layer w0.2: v1(59,49.6) 58.76,49.6 58.66,49.5 58.6,49.56 58.6,57.8 59.2,58.4 59.231,58.4 59.7,58.869 59.7,58.9 61.675,58.9 U1.VCAP@61.725,58.95 ; U1.VCAP@59.25,40.475 59.25,36.95 58.8,36.5 56.806,36.5 56.4,36.094 56.4,23.2 56.6,23 57.3,23 57.44,22.86 C10.2@57.44,21.8 C11.2@59.36,21.8
  Signal Layer 1 w0.2: v1(59,49.6) 59,49.4 58.9,49.3 58.9,47.219 58.5,46.819 58.5,43.456 58.9,43.056 58.9,40.975 59.25,40.625 v1@59.25,37.8
  other v1: 59.1,37.6
VDDA: C9.2 C13.2 C14.2 R48.1 R49.2 U1.VDDA | length 77.6
  Top Layer w0.2: C13.2@20.943,35.492 21.6,35.492 ; v1@21.5,30.6 21.8,30.9 26.5,30.9 29.9,34.3 33.3,34.3 33.7,33.9 v1(34.06,33.9) ; v1(21.7,34.7) 21.7,35.392 21.6,35.492 ; C14.2@22.67,35.492 21.6,35.492 ; v1@36.8,37 38.26,37 R49.2@39.06,37.8 39.06,39.495 41.6,42.034 41.6,43.8 41.45,43.95 U1.VDDA@40.275,43.95 ; v1@57,19 57,18.8 57.94,17.86 R48.1@58.8,17.86 59.04,17.62 C9.2@59.04,16
  Signal Layer 1 w0.2: v1@43,24.4 43,23.52 45.22,21.3 52.9,21.3 55.1,19.1 v1(56.982,19.1)
  Signal Layer 2 w0.2: v1(34.06,33.9) 32.6,32.44 32.6,31.869 31.7,30.969 31.7,27.669 32.169,27.2 40.3,27.2 v1(43,24.5)
  Bottom Layer w0.2: v1(21.36,30.5) 21.36,33.86 v1@21.7,34.2 ; v1@34,34.1 34,36.44 34.56,37 v1(36.5,37)
VREF+: R49.1 U1.VREF+ | length 9
  Top Layer w0.2: U1.VREF+@40.275,44.45 41.516,44.45 42,43.966 42,41.8 40.4,40.2 40.4,38.4 R49.1@41,37.8
VREFP: C1.2 C15.2 C16.2 R1.1 | length 33.5
  Top Layer w0.2: v1(75.5,62) 76,62.5 R1.1@77.26,62.5 ; v1@80.1,41.8 80.74,41.16 C15.2@80.74,40.5 81.65,40.5 ; C1.2@81.16,35.8 81.16,37.26 81.65,37.75 81.65,40.5 ; C16.2@82.56,40.5 81.65,40.5
  Signal Layer 2 w0.2: v1(75.5,62) 76,62 76.3,62.3 77.2,62.3 78.5,61 78.5,47.65 80,46.15 v1(80,42)
WAKEUP_KEY: R26.1 R31.1 S1.1 | length 22.2
  Top Layer w0.2: R31.1@82.96,18.4 82.96,16.74 86.2,13.5 88.86,13.5 91.7,10.66 ; S1.1@91.7,7 91.7,10.66 ; R26.1@95.7,14.66 91.7,10.66
pads on no net: P1.1 P1.2 P1.9 P1.13 P1.14 P3.6 P3.10 P3.12 P3.24 P3.26 P4.5 P4.8 P4.17 P6.29 S1.3 S1.4 S1.5 S2.3 S2.4 S2.5 U3.1 U3.10 U3.11 U3.12
copper on no net: | length 0.1
  Signal Layer 1 w0.2: 81.5,67 81.5,67.053
  Bottom Layer w0.2: 60.7,56.85 60.7,56.853

## Polygon pours and split planes (outlines as drawn)
GND on Signal Layer 2 "Signal Layer 2-GND 3" (solid, pour order 11): 7,91.176 7,15.1 91.3,15.1 91.5,14.9 91.5,90.3 91.2,90.6
GND on Signal Layer 2 "Signal Layer 2-GND 1" (solid, pour order 6): 64.195,8.7 72.4,8.7 77.7,14 82.3,14 82.4,14.1 82.4,24.7 84.2,26.5 87.2,26.5 90.1,29.4 90.1,50.8 87.9,53 87.9,55.7 88.8,56.6 90.5,56.6 90.5,56.5 91.3,55.7 91.3,54.3 91.7,54.3 93.3,52.7 93.3,14.3 91.7,12.7 85.5,12.7 85.5,11.8 80,6.3 64.6,6.3 64.1,6.8
no net on Signal Layer 2 "Signal Layer 2-No Net 1" (solid, pour order 9): 0.8,99.4
GND on Signal Layer 2 "GNDSIG2" (solid, pour order 2): 11.2,7.4 11.2,18.1 1.2,18.1 1.2,20.4 1.3,20.5 4.1,20.5 4.2,20.6 4.2,30.1 4.3,30.2 9.5,30.2 9.6,30.3 9.6,26.5 7.9,24.8 7.9,21.3 26.4,21.3 26.9,20.8 26.9,15.7 26.2,15 20.7,15 19.56,13.86 19.56,7.5
GND on Signal Layer 2 "Signal Layer 2-GND" (solid, pour order 7): 10.6,80.6 1.5,80.6 1.1,81 1.1,93.1 2,94 16.4,94 17.7,95.3 27.9,95.3 31.3,91.9 31.3,88.2 29.1,86 16.5,86 15.7,86.8 11.4,86.8 11.4,81.4
GND on Signal Layer 2 "Signal Layer 2-GND 2" (solid, pour order 4): 9.6,30.159 9.6,46.9 15.4,52.7 15.4,55.9 17.1,57.6 17.1,59.55 16.3,60.35 16.3,69.1 15.1,70.3 15.1,74.4 14.1,75.4 14.1,83.8 12,85.9 7.5,85.9 6.1,84.5 6.3,84.3 6.3,64.52 9.38,64.52 10.5,63.4 10.5,57.3 6.2,53 6.2,29.9
no net on Signal Layer 2 "Signal Layer 2-No Net" (solid, pour order 0): 12.8,17.1
3V3 on Signal Layer 1 "Signal Layer 1-3V3" (solid, pour order 15): 13.1,91.8 13.1,91.7 91.8,13 91.8,88.5 88.5,91.8
3V3_VDD on Signal Layer 1 "Signal Layer 1-3V3_VDD" (solid, pour order 13): 7.3,92 7.3,10.7 95.4,10.7 95.6,10.9 92,10.9 11,91.9 7.4,91.9

## Silkscreen, mask and mechanical layers (free items; w line width, h text height)
Top Overlay:
  text "5VPWR" at 12.2,91.2 h1
  text "5VUSBCHRG" at 68.5,74.1 h1
Mechanical 1:
  the board outline again, w1

## Text inside footprints (layer, text, board x,y; h text height)
P1: Top Overlay "1" at 0.697,94.842 h1.97; Top Overlay "2" at 0.697,96.468 h1.97; Top Overlay "13" at 12.903,94.842 h1.97; Top Overlay "14" at 12.903,96.468 h1.97; Mechanical 40 "1.270" at -2.287,96.163 h0.39; Mechanical 40 "3.429" at -4.128,96.163 h0.39; Mechanical 40 "1.270" at 0.761,99.402 h0.39; Mechanical 40 "8.890" at 6.54,91.464 h0.39; Mechanical 40 "7.620" at 6.54,100.418 h0.39; Mechanical 40 "1.143" at 12.382,96.798 h0.39; Mechanical 40 "1.143" at 12.953,99.02 h0.39; Mechanical 16 "1" at 0.697,94.842 h1.97; Mechanical 16 "2" at 0.697,96.468 h1.97; Mechanical 16 "13" at 12.903,94.842 h1.97; Mechanical 16 "14" at 12.903,96.468 h1.97
P2: Top Overlay "13" at 80.852,1.292 h1.27; Top Overlay "14" at 80.852,3.832 h1.27; Top Overlay "1" at 60.532,1.292 h1.27; Top Overlay "2" at 60.532,3.832 h1.27
P3: Top Overlay "2" at 3.692,80.81 h1.27 r270; Top Overlay "1" at 1.152,80.81 h1.27 r270; Top Overlay "37" at 1.152,31.026 h1.27 r270; Top Overlay "38" at 3.692,31.026 h1.27 r270
P4: Top Overlay "38" at 97.292,24.656 h1.27 r270; Top Overlay "37" at 94.752,24.656 h1.27 r270; Top Overlay "1" at 94.752,74.44 h1.27 r270; Top Overlay "2" at 97.292,74.44 h1.27 r270
P6: Top Overlay "32" at 71.144,97.132 h1.27; Top Overlay "31" at 71.144,94.592 h1.27; Top Overlay "1" at 28.98,94.592 h1.27; Top Overlay "2" at 28.98,97.132 h1.27
P7: Top Overlay "2" at 15.46,4.032 h1.27; Top Overlay "1" at 15.46,1.492 h1.27; Top Overlay "31" at 57.624,1.492 h1.27; Top Overlay "32" at 57.624,4.032 h1.27
P8: Mechanical 13 "PCB END" at 99.25,88.35 h1.88 r90; Mechanical 13 "PCB END" at 99.25,88.35 h1.88 r90